# Altium PCB T35_V2.1.PcbDoc (part 5 of 5)
Units mil, origin at the board's own origin, x right, y up, seen from the top; angles counter-clockwise.
Board outline 2372.44 x 1023.62 mil, 12 copper layers (TOP, L2-G, L3, L4-G, L5, L6-V, L7-V, L8, L9-G, L10, L11-G, BOTTOM), stack 62.192 mil thick; 356 components, 288 nets, 1478 pads, 832 vias.
Unrouted connection lines stored in the file: 19.
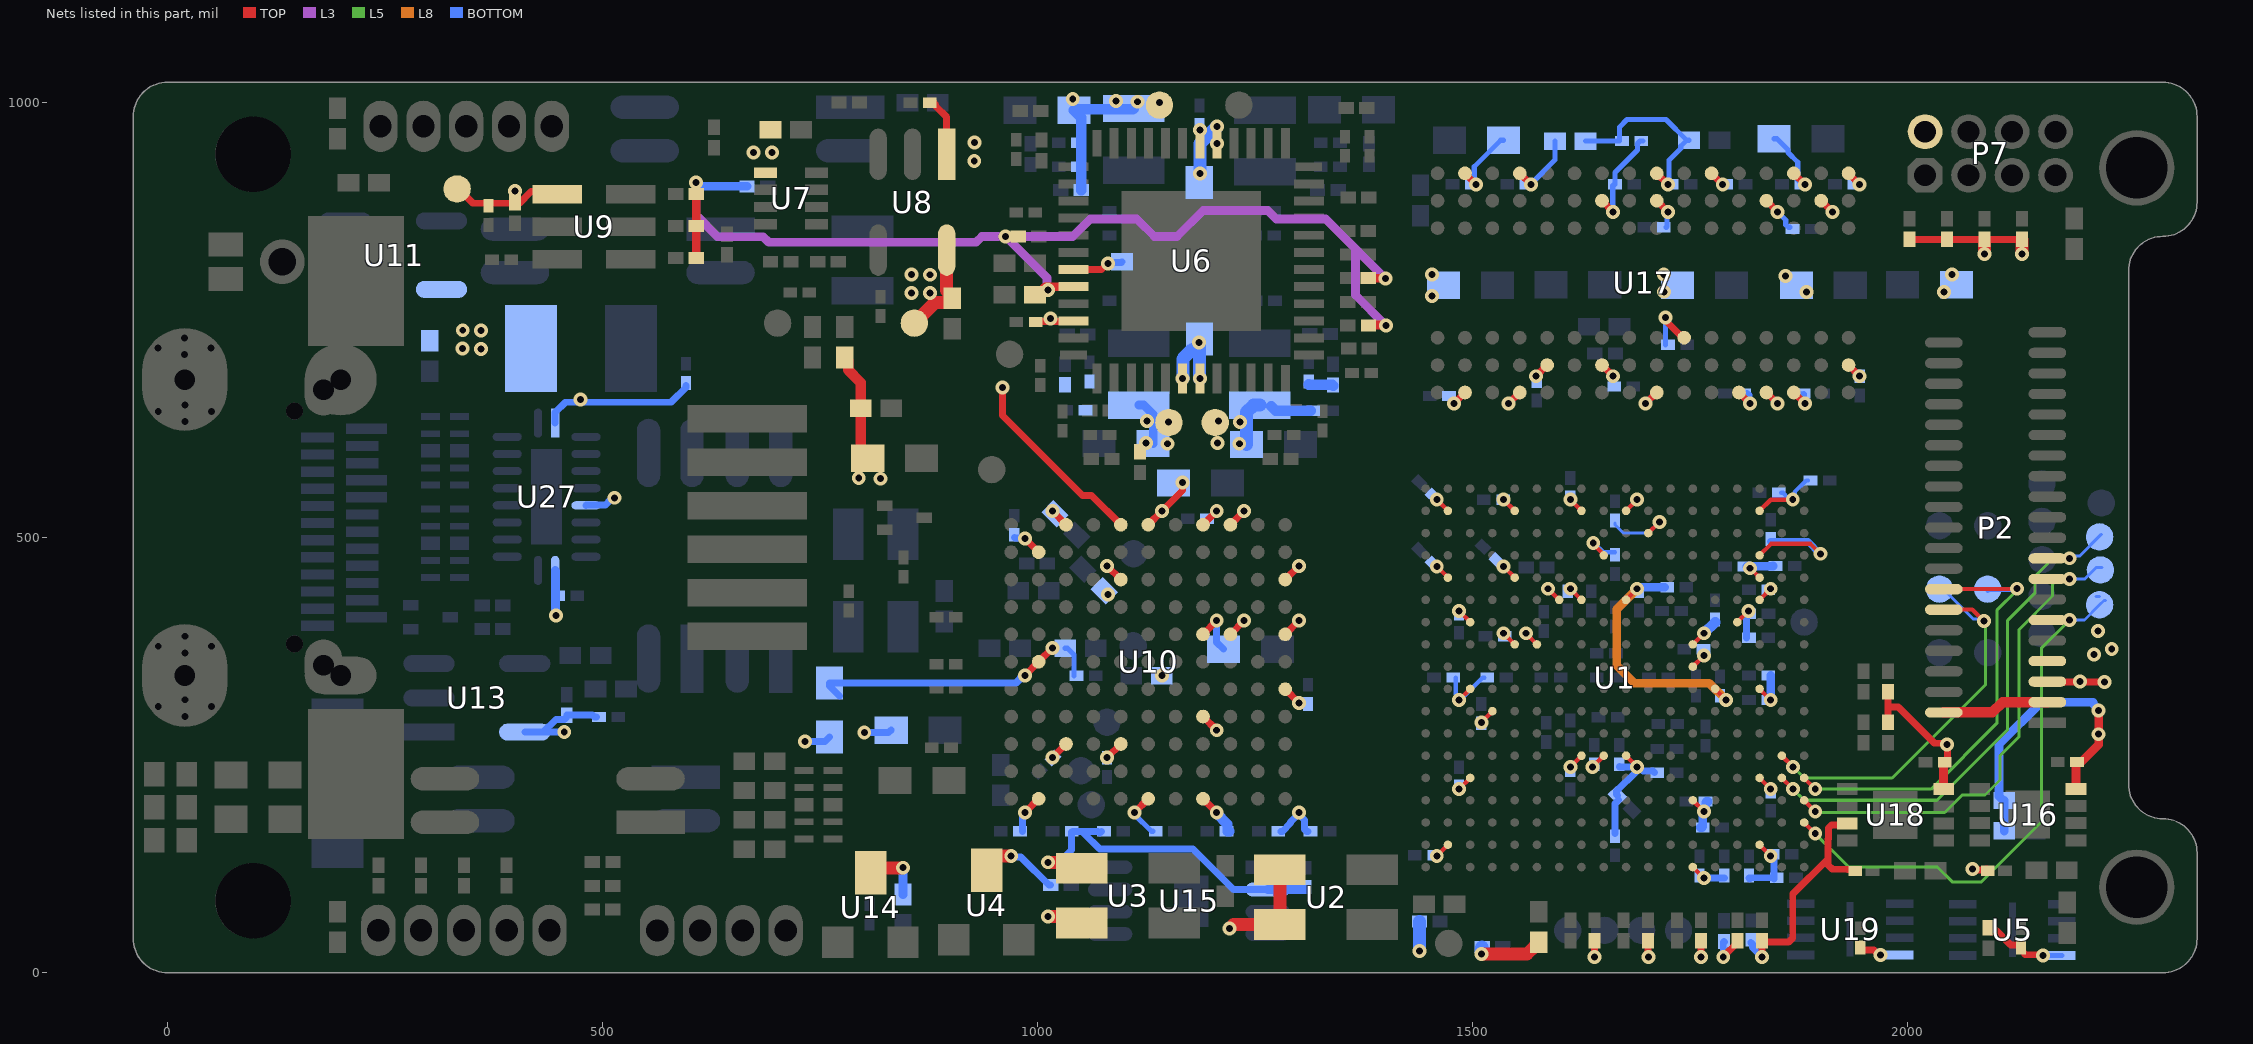
[diagram p15: the nets of this part, all layers, seen from the top]

## Via types
v1: diameter 16, hole 8, TOP to BOTTOM, tented both sides, 832 vias

## Nets (pads, with @x,y where several pads share a name; then routed paths per layer and width w, separated by ;. In a path a pad name is that pad's centre, name@x,y a point inside that pad or via, vN(x,y) a via of type N, cw(c..) or ccw(c..) an arc to the next point about the centre after c; other vN are vias at no path point) (continued)
VCC1V2_BR: C33.1 FB4.2 U1.N8 U1.P8 | length 36.2
  TOP w5: v1(1535.89,390.25) U1.P8@1548.69,377.46 ; v1(1561.48,390.25) U1.N8@1574.28,377.46
  other v1: 1453.84,777.82 1453.84,802.45
VCC1V2_MIPI_RX: C23.1 C24.1 C25.1 FB2.2 U1.C5 U1.H3 | length 130.4
  TOP w5: U1.H3@1702.23,505.41 v1(1715.02,518.21) ; v1(1819,465) 1819.2,465 1829.98,454.23 U1.C5@1830.18,454.23
  BOTTOM w3.5: C24.1@1664,516.97 1664,515 1673.55,505.46 1702.27,505.46 v1(1715.02,518.21)
  BOTTOM w10: C25.1@1815.39,467.02 1816.98,467.02 v1(1819,465) ; C25.1@1815.68,467.32 1845.29,467.32 C23.1@1845.58,467.61
  other v1: 1884.23,782.61 1860,800.98
VCC1V2_MIPI_TX: C20.1 C21.1 C22.1 FB1.2 U1.C2 U1.C6 | length 108.6
  TOP w5: U1.C6@1830.18,428.64 v1(1842.98,441.43) ; U1.C2@1830.18,531 1842.98,543.8 v1(1868.32,543.8)
  BOTTOM w5: C22.1@1855.05,551.83 1857.02,551.83 1862.94,545.9 1866.21,545.9 v1(1868.32,543.8) 1870.42,545.9 1870.42,552.53 1883.8,565.91 C21.1@1885.77,565.91
  other v1: 2042.15,782.61 2051.49,802.45
VCC1V2_TR: C34.1 C35.1 FB5.2 U1.F8 U1.F9 | length 54.3
  TOP w5: U1.F9@1753.41,351.87 v1(1766.21,364.66) ; U1.F8@1753.41,377.46 v1(1766.21,390.25)
  BOTTOM w12: v1(1766.21,390.25) C34.1@1779,403.05
  other v1: 1720.21,782.8 1720,802.45
VCC1V5: C36.1 C37.1 C38.1 C39.1 C40.1 C41.1 C42.1 C43.1 C85.2 C86.1 C89.1 C138.1 C139.1 C140.1 C141.1 C142.1 C143.1 C144.1 C145.1 C146.1 C147.1 C148.1 C149.1 C150.1 C151.1 C152.1 C153.1 C154.1 L2.2 R38.2 R79.2 T11.1 U1.J2 U1.K4 U1.L2 U1.L6 U1.P2 U1.P5 U1.T7 U1.U2 U1.U5 U17.A1 U17.A8 U17.B2 U17.C1 U17.C9 U17.D2 U17.D9 U17.E9 U17.F1 U17.G7 U17.H2 U17.H9 U17.K2 U17.K8 U17.N1 U17.N9 U17.R1 U17.R9 | length 1112.5
  TOP w5: v1(1459.12,467.02) U1.U5@1471.91,454.23 ; v1(1459.12,543.8) U1.U2@1471.91,531 ; v1(1484.71,415.84) U1.T7@1497.5,403.05 ; v1(1535.89,467.02) U1.P5@1548.69,454.23 ; v1(1535.89,543.8) U1.P2@1548.69,531 ; v1(1612.66,441.43) U1.L6@1625.46,428.64 ; v1(1612.66,543.8) U1.L2@1625.46,531 ; v1(1638.99,494) 1638.99,492.94 1651.05,480.88 U1.K4@1651.05,479.82 ; U1.J2@1676.64,531 v1(1689.43,543.8)
  TOP w8: v1(1478.73,654.23) U17.R9@1491.53,667.02 ; U17.R1@1491.53,918.99 v1(1504.32,906.2) ; v1(1541.72,654.23) U17.N9@1554.52,667.02 ; U17.N1@1554.52,918.99 v1(1567.32,906.2) ; U17.K8@1649.01,698.52 1661,686.53 v1@1661,686 ; U17.K2@1649.01,887.5 v1(1661.8,874.7) ; v1@1661.26,686.26 v1(1661.8,685.72) 1662,685.53 v1@1662,685 ; v1(1699.2,654.23) U17.H9@1712,667.02 ; U17.H2@1712,887.5 v1(1724.8,874.7) ; v1(1722.2,753) ccw(c1729.93,753) 1722.25,752.1 ccw(c1729.93,753) 1724.46,747.54 U17.G7@1744,728 ; U17.F1@1774.99,918.99 v1(1787.79,906.2) ; U17.E9@1806.49,667.02 v1(1819.28,654.23) ; U17.D9@1837.98,667.02 v1(1850.78,654.23) ; U17.D2@1837.98,887.5 v1(1850.78,874.7) ; U17.C9@1869.48,667.02 v1(1882.28,654.23) ; U17.C1@1869.48,918.99 v1(1882.28,906.2) ; U17.B2@1900.98,887.5 v1(1913.77,874.7) ; U17.A8@1932.47,698.52 v1(1945.27,685.72) ; U17.A1@1932.47,918.99 v1(1945.27,906.2)
  BOTTOM w5: v1(1638.99,494) 1639.78,494 1650.35,483.43 C38.1@1664,483.43
  BOTTOM w6: v1(1504.32,906.2) 1502.17,908.35 1502.17,926.6 1532.57,957 C146.1@1535.82,957 ; v1(1567.32,906.2) 1567.32,906.8 1595,934.48 R79.2@1595,956 ; v1(1661.8,874.7) 1661.4,875.1 1661.4,904.88 C142.1@1663.95,907.43 ; C142.1@1663.95,906.45 C142.1@1663.95,907.43 ; C154.1@1696,956 C154.1@1694.05,956 1692.68,956 1689.77,953.09 1689.77,945.77 1663.95,919.95 C142.1@1663.95,907.43 ; C152.1@1722,722 1722.1,722.1 1722.1,752.9 v1(1722.2,753) ; C140.1@1723,857 1723.9,857.9 1723.9,873.8 v1(1724.8,874.7) ; C147.1@1847,958.77 1850.25,958.77 1863,946.02 1863,942.77 1874,931.77 C138.1@1874,912 ; v1(1850.78,874.7) 1860.36,865.11 1860.36,859.91 1863.27,857 C148.1@1865,857 ; C138.1@1873.74,911.74 1879.28,906.2 v1(1882.28,906.2) ; C145.1@1876.95,666 1879.85,663.09 1879.85,659.36 1882.28,656.93 v1(1882.28,654.23) ; C145.1@1880.93,666 1881.6,665.33 1881.6,658.4 v1@1883,657
  BOTTOM w8: v1(1478.73,654.23) v1@1480.26,655.76 ; C144.1@1815.39,666 1815.85,666 1817.75,664.09 1817.75,655.76 v1(1819.28,654.23)
  BOTTOM w12: R38.2@1050.29,899.57 1050.29,983.11 C86.1@1041.97,991.43 1042.97,992.43 1109.64,992.43 L2.2@1110.64,993.43
  other v1: 1140.12,1000.18 1115.25,1001.24 1090.38,1002.3 1040.64,1004.42
VCC1V8: C3.2 C4.1 C50.1 C51.1 C52.1 C56.1 C57.1 C58.1 C59.1 C60.1 C94.2 C95.1 C97.1 C119.1 C120.2 L3.2 P2.2 P2.3 R42.2 R71.1 R72.1 R93.1 SJ2.1 T12.1 U1.C10 U1.C14 U1.E10 U1.F15 U1.J6 U3.1 U3.4 U15.2 U16.8 | length 1405.4
  TOP w5: U1.J6@1676.64,428.64 v1(1689.43,441.43) ; U1.F15@1753.41,198.32 v1(1766.21,185.53) ; U1.E10@1779,326.28 v1(1791.8,313.48) ; U1.C14@1830.18,223.91 v1(1842.98,211.12) ; U1.C10@1830.18,326.28 v1(1842.98,313.48)
  TOP w8: v1(2074.76,119.25) 2074.76,117.71 v1@2074.84,117.64 ; v1@2077.56,118.07 SJ2.1@2085.56,118.07
  TOP w10: v1(2074.76,119.25) 2076.39,119.25 v1@2077.56,118.07 ; SJ2.1@2091.38,118.07 SJ2.1@2092.28,117.16 ; U16.8@2193.93,211.35 2193.93,240.24 2195.96,242.27 2199.89,242.27 2220,262.37 v1@2220,295
  TOP w12: P2.2@2041.92,299.21 2097.81,299.21 2109.62,311.02 P2.3@2161,311.02
  TOP w15: v1(1012.43,64.88) U3.1@1044.07,64.88 ; v1(1012.43,127) 1044.07,127 U3.4@1050.85,120.22
  L8 w10: v1(1689.43,441.43) 1666,418 1666,353.17 1686.35,332.82 1772.46,332.82 v1(1791.8,313.48)
  BOTTOM w8: v1(1012.43,127) 1025,127 1039,141 C3.2@1039,161.22 ; C3.2@1039,162 C3.2@1039,161.22 ; 1053.14,160.69 1071.69,142.15 1178.85,142.15 1225.3,95.7 U15.2@1264.77,95.7 ; C4.1@1071.69,160.69 C4.1@1073.59,162.6 ; C4.1@1071.69,160.73 1069.82,162.6 1040.38,162.6 C3.2@1039,161.22
  BOTTOM w10: L3.2@1116.64,652.57 1122.29,652.57 1133.04,641.82 C95.1@1133.04,608.4 ; U15.2@1264.77,95.7 C119.1@1309.14,95.71 ; v1(1689.43,441.43) 1691,443 C56.1@1721,443 ; C51.1@1762,167 1763.97,167 1764.87,167.91 1764.87,182.57 1766.21,183.9 v1(1766.21,185.53) 1766.21,187.15 1768.13,189.07 1768.13,195.98 1769.03,196.89 C58.1@1771,196.89 ; v1(1842.98,313.48) C57.1@1842.98,341.74 ; R71.1@2111.29,163.07 R72.1@2111.29,198 2110.35,198 2105.35,203 2105.35,262.65 2153.79,311.1 2213.74,311.1 2213.74,308.88 2219.6,303.02 v1(2219.6,301.4)
  other v1: 2219.6,274.2 1149.58,608.13 1124.71,609.19 1150.64,633 1125.77,634.06
VCC2V5: C26.1 C27.1 C28.1 C106.1 T15.1 U1.C4 U1.D7 U8.5 | length 307.4
  TOP w5: U1.D7@1804.59,403.05 v1(1817.39,415.84) ; U1.C4@1830.18,479.82 1843.35,492.99 1888.69,492.99 v1(1900.06,481.61)
  TOP w15: T15.1@858.56,746.74 882.44,770.62 899.54,770.62 902.04,773.12 C106.1@902.04,775.34 902.04,777.84 895.78,784.1 U8.5@895.78,830.66
  BOTTOM w8: C26.1@1815,385 1815,413.46 v1(1817.39,415.84) ; C27.1@1842.98,495.61 1885.78,495.61 1899.78,481.61 v1(1900.06,481.61)
  other v1: 855.2,781.34 876.41,781.16 855.39,802.55 876.59,802.36
VCC3V3: C1.2 C2.1 C19.1 C31.1 C44.1 C45.1 C46.1 C47.1 C48.1 C49.1 C53.1 C54.1 C55.1 C61.1 C62.1 C63.1 C64.1 C65.1 C66.1 C99.2 C100.1 C101.1 C112.2 C115.2 C128.2 C129.2 C130.2 C131.2 C132.2 C157.1 C158.2 C159.2 FB9.1 L4.2 P2.5 P7.2 R3.1 R4.1 R5.2 R6.1 R7.1 R8.1 R9.2 R10.1 R11.1 R12.1 R13.1 R14.1 R15.1 R16.1 R17.1 R18.1 R45.2 R59.1 R60.1 R67.1 R68.1 R69.1 R70.2 R84.2 SJ1.1 T13.1 U1.C17 U1.F18 U1.J13 U1.K13 U1.L13 U1.R11 U1.T10 U1.T14 U1.U17 U2.1 U2.4 U4.3 U5.8 U10.B1 U10.C11 U10.E3 U10.F1 U10.H4 U10.H7 U10.H11 U10.J7 U10.L9 U13.5 U14.3 U18.3 U18.8 U19.8 U27.1 U27.6 U27.10 | length 2650.9
  TOP w5: v1(1459.12,134.35) U1.U17@1471.91,147.14 ; v1(1484.71,211.12) U1.T14@1497.5,223.91 ; v1(1484.71,313.48) U1.T10@1497.5,326.28 ; v1(1510.3,287.89) U1.R11@1523.09,300.69 ; v1(1612.66,236.71) U1.L13@1625.46,249.5 ; v1(1638.25,236.71) U1.K13@1651.05,249.5 ; U1.J13@1676.64,249.5 v1(1689.43,236.71) ; U1.F18@1753.41,121.55 v1(1766.21,108.76) ; U1.C17@1830.18,147.14 v1(1842.98,134.35) ; 1908,130 1908,128.36 1909,127.36 ; 1911.83,168.83 1914,168.83
  TOP w8: v1(985.68,184.26) U10.B1@1001.42,200.01 ; v1(1017.17,530.72) U10.C11@1032.92,514.97 ; v1(1080.16,247.25) U10.E3@1095.91,263 ; v1(1111.66,184.26) U10.F1@1127.41,200.01 ; U10.H4@1190.4,294.5 v1(1206.15,278.75) ; U10.H7@1190.4,388.99 v1(1206.15,404.73) ; U10.H11@1190.4,514.97 v1(1206.15,530.72) ; U10.J7@1221.9,388.99 v1(1237.64,404.73) ; U10.L9@1284.89,451.98 v1(1300.64,467.73) ; v1(1640.36,18) R12.1@1640.36,36.87 ; R14.1@1701.68,36.87 1701.98,36.57 1701.98,18.3 v1(1702.27,18) ; v1(1762.8,18) 1762.9,18.1 1762.9,36.77 R13.1@1762.99,36.87 ; v1(1788.4,18) 1788.4,18.56 1804.74,34.9 R84.2@1804.74,36.87 ; v1(1832.74,18) R9.2@1832.74,36.87 1834.49,35.11 1863.63,35.11 1868.32,39.79 1868.32,90.32 1908,130 ; 1913,170 1911.83,168.83 1909.16,166.16 1909.16,153.72 1909,153.56 1909,127.36 1909,124 1914,119 1931.38,119 1931.45,118.92 1938.03,118.92 SJ1.1@1939.94,117.02 ; 1914,170 1929.28,170 U18.3@1931,171.72 ; C31.1@1946,26.09 1961.53,26.09 1967.2,20.42 v1(1969.36,20.42) ; R11.1@1977.94,288 1977.94,305.42 ; R10.1@1977.94,322.83 1977.94,305.42 ; R15.1@2002.37,843.06 R17.1@2045.58,843.06 R18.1@2088.79,843.06 R16.1@2132,843.06 ; C158.2@2046,242 2046,261.88 v1(2045.58,262.3) 2044.05,263.83 2031.18,263.83 1989.59,305.42 1977.94,305.42 ; R7.1@2093.46,51.86 2093.46,49.9 2096.35,47.01 R7.1@2097,47.01 ; R7.1@2097,48 2103,48 2118.89,32.11 2126.51,32.11 2128.66,32.11 2130.56,30.21 C157.1@2130.56,29.04 ; C157.1@2130.07,28.55 2130.56,28.05 C157.1@2130.56,26.09 ; C157.1@2134.44,22.21 2135.93,20.72 2155.01,20.72 v1(2155.93,19.81) ; P2.5@2161.32,334.32 2226.28,334.32 v1(2226.6,334)
  TOP w10: U18.8@2041.63,211.09 C158.2@2041.63,236.41
  TOP w15: U14.3@808.57,115.04 813.74,120.22 845.03,120.22 v1(845.57,120.75) ; U4.3@941.71,117.8 941.71,123.85 952.21,134.35 v1(969.93,134.35) ; v1(1221,51) 1225.5,55.5 U2.1@1278.64,55.5 1278.64,116.64 U2.4@1283,121 ; v1(1510.3,21.53) 1562.82,21.53 1571.4,30.11 1573.9,30.11 1576.4,32.61 R4.1@1576.4,35.11 ; v1(2088.79,826.45) R18.1@2088.79,843.06 ; v1(2132,826.45) R16.1@2132,843.06
  BOTTOM w5: C46.1@1481,339.28 1481,320.16 1484.71,316.46 v1(1484.71,313.48) 1486.23,313.48 1512.03,339.28 C54.1@1514,339.28
  BOTTOM w6: v1(1111.66,184.26) 1111.66,182.01 1131.07,162.6 C129.2@1133.04,162.6 ; v1(2155.93,19.81) U5.8@2177.64,19.81
  BOTTOM w8: U13.5@410.74,276.61 U13.5@431.88,276.61 ; U27.1@445.69,631.78 445.69,643.78 457.69,655.79 v1@475,655.79 ; v1(456.11,276.61) U13.5@431.88,276.61 ; v1(475,659) v1@475,655.79 ; U27.6@481.12,537.29 481.4,537.56 503.36,537.56 v1@509.6,543.8 ; C115.2@493,294 491.03,294 488.84,296.19 R67.1@459,296.19 459,294.22 456.11,291.33 446.6,291.33 U13.5@431.88,276.61 ; v1@509.64,543.8 511.84,546 v1(514,546) ; C159.2@596.06,674.94 596.06,672.97 578.88,655.79 v1@475,655.79 ; v1(733,266) 756,266 FB9.1@761,271 ; v1(969.93,134.35) 971.46,132.82 981.41,132.82 1013.22,101 R70.2@1015.19,101 ; C128.2@983,162.6 983,179.42 985.68,182.1 v1(985.68,184.26) ; v1(1206.15,404.73) 1206.15,379.85 C132.2@1214,372 ; C2.1@1279.73,162.6 1281.69,162.6 1291.2,172.1 1291.2,173.48 v1@1300.64,182.92 ; v1(1300.64,184.26) v1@1300.64,182.92 ; C1.2@1311.07,162.6 1309.1,162.6 1307.2,164.51 1307.2,175.54 1300.64,182.1 v1@1300.64,182.92 ; C55.1@1664,160 1664,194.4 R8.1@1668.04,198.43 ; R8.1@1666.64,203.91 1665.87,204.68 1665.87,208.77 1687.9,230.8 1687.9,235.18 v1(1689.43,236.71) ; C62.1@1669,236.86 1669.08,236.78 v1(1689.43,236.71) v1(1689.43,236.71) ; C64.1@1709.61,230 1707.71,231.91 1696.4,231.91 1691.6,236.71 v1(1689.43,236.71) ; v1(1766.21,108.76) C53.1@1789.6,108.76 ; v1(1788.4,18) 1788.4,34.89 R5.2@1789.46,35.95 R5.2@1789.94,35.48 ; C66.1@1818,108.76 C66.1@1818.38,108.38 ; C66.1@1818.8,107.6 1818.8,108.09 1819.91,109.2 1846.98,109.2 1846.98,134.44 1845.42,136 C61.1@1845,136 ; C65.1@1820,35 1821.91,33.09 1821.91,28.83 v1(1832.74,18) ; C63.1@1846.6,108.38 C63.1@1846.98,108
  BOTTOM w10: U27.10@445.69,462.48 445.96,462.21 445.96,411.29 v1(446.6,410.66) ; R68.1@845.57,90 v1(845.57,120.75)
  BOTTOM w12: L4.2@1269,651 1273.91,646.09 1313.91,646.09 C99.2@1314,646 ; C101.1@1312,676.69 1312,676.26 1312.09,676.16 1338.84,676.16 R45.2@1340,675
  BOTTOM w15: C100.1@1240.29,607.27 1240.29,644.32 1248.54,652.57 L4.2@1255.64,652.57 ; v1(1439.19,25.25) R6.1@1439.19,58.7 ; v1(1510.3,21.53) 1510.49,21.72 1510.49,29.06 1511.1,29.67 R3.1@1511.21,29.67
  other v1: 2198.4,335 1143.16,341.74 1080.99,435 1232.08,608.13 1207.21,609.19 1233.14,633 1208.27,634.06
VCC3V3IOUSB: C126.2 C127.2 FB9.2 U10.B6 | length 385.1
  TOP w8: v1(985.68,341.74) U10.B6@1001.42,357.49 v1(1017.17,373.24)
  BOTTOM w6: v1(985.68,341.74) v1@987.24,341.74 ; C126.2@1032,373 1034.5,373 1042,365.5 C127.2@1042,341.28
  BOTTOM w8: FB9.2@772.75,318.01 761,329.76 FB9.2@761,333 974.77,333 983.51,341.74 v1(985.68,341.74) ; 936,333 976,333 v1@982,339
  BOTTOM w10: v1@981.65,339.35 983.31,341 v1@986,341
VCC5V: C29.1 C32.1 C68.2 C69.2 C70.2 C73.2 C104.1 C110.2 ECP1.1 P2.7 R52.1 T1.1 U6.5 U6.6 U6.22 U6.30 U6.31 U7.1 U8.1 U9.1 U10.E11 U11.5 | length 612.5
  TOP w8: T1.1@333,901 334.74,901 351.17,884.57 369.08,884.57 404.57,884.57 418,898 444.91,898 U9.1@447.95,894.97 ; R52.1@399.52,885.38 v1@399.5,898.49 ; C29.1@879.2,1000.18 881.17,1000.18 883.07,998.27 883.07,996.3 895.78,983.6 U8.1@895.78,940.9 ; v1(959.81,672.64) 959.81,640.74 1051.92,548.63 1062.25,548.63 U10.E11@1095.91,514.97 ; C73.2@1000.91,748.15 1001.5,748.74 1041.02,748.74 U6.22@1041.61,749.34
  BOTTOM w15: v1(1167.01,683) 1167.2,683.19 1167.2,705.75 C70.2@1178.1,716.65 ; v1(1185.86,724.41) 1186.52,723.75 1186.52,683.17 v1(1186.69,683) ; v1(1186.69,918.99) 1186.69,953.04 1206.38,972.73 v1(1206.38,973)
  other v1: 2214.4,366 2235,372 2219.2,392.8 339.25,717.39 360.46,717.21 339.43,738.6 360.64,738.42 1015.19,752.02 399.49,898.5 927.41,933.16 673.76,943.13 694.96,942.95 1206.38,953.47 927.59,954.36 1186.69,969
VCCFX3: C133.2 C134.2 C135.2 C136.2 C137.2 FB7.1 FB8.1 R76.1 R77.1 U10.B10 U10.C3 U10.E9 U10.F11 U10.H1 U10.J11 U10.L5 U10.L7 | length 421.3
  TOP w8: v1(985.68,499.22) U10.B10@1001.42,483.47 ; v1(1017.17,247.25) U10.C3@1032.92,263 ; v1(1080.16,467.73) U10.E9@1095.91,451.98 ; U10.F11@1127.41,514.97 v1(1143.16,530.72) 1167.01,554.57 v1(1167.01,563.5) ; U10.H1@1190.4,200.01 v1(1206.15,184.26) ; U10.J11@1221.9,514.97 v1(1237.64,530.72) ; U10.L5@1284.89,325.99 v1(1300.64,310.25) ; U10.L7@1284.89,388.99 v1(1300.64,404.73)
  TOP w12: R77.1@778.42,707.24 782.42,703.24 782.42,692.9 797,678.31 R76.1@797,649 797,599.38 FB7.1@805.02,591.36
  BOTTOM w8: v1(801,276) 829,276 FB8.1@832,279 ; C137.2@973.44,500.4 974.03,499.81 985.09,499.81 v1(985.68,499.22)
  BOTTOM w12: v1(1206.15,184.26) 1206.15,183.18 1218.51,170.82 1218.51,162.69 1218.6,162.6 C135.2@1220.38,162.6
  other v1: 819.53,567.91 794.66,568.97
VDD_DDR_VREF: C154.2 C155.1 C156.1 R79.1 R80.2 U1.M6 U17.H1 U17.M8 | length 262.7
  TOP w5: v1(1587.07,441.43) U1.M6@1599.87,428.64
  TOP w8: v1(1573.22,685.72) U17.M8@1586.02,698.52 ; U17.H1@1712,918.99 v1(1724.8,906.2)
  BOTTOM w6: R79.1@1630,956 1669,956 1669,972 1677.92,980.92 1722.58,980.92 R80.2@1746.5,957 ; v1(1724.8,906.2) 1726,907.4 1726,934 1739.5,947.5 1739.5,950 R80.2@1746.5,957 ; R80.2@1749,957 R80.2@1746.5,957
VDDA: C72.1 U6.19 | length 59.4
  TOP w8: U6.19@1041.61,808.39 1073.94,808.39 v1(1080.99,815.45)
  BOTTOM w8: v1(1080.99,815.45) 1081.93,816.38 1096.44,816.38 C72.1@1097.37,817.31
VDDD: C67.1 R25.1 R31.2 R43.1 R47.2 R48.2 R49.2 R53.2 U6.20 | length 1339.9
  TOP w8: v1(963.53,846.45) R43.1@978.1,846.45
  TOP w10: R49.2@607.76,821.57 R48.2@607.76,858.27 R47.2@607.76,894.97 v1(607.76,908.21) ; C67.1@997.12,779.45 999.62,779.45 1008.88,788.71 U6.20@1041.61,788.71 ; R31.2@1380.43,798.45 1399.55,798.45 v1(1400,798) ; R25.1@1381.04,744.6 v1@1400.17,744.6
  L3 w10: v1(607.76,908.21) 607.76,870.67 632.22,846.21 684.64,846.21 691.28,839.57 929.39,839.57 936.27,846.45 v1(963.53,846.45) ; v1(1012.26,785) 1011.11,786.15 1011.11,798.86 v1(963.53,846.45) ; v1(1400,798) 1365.72,832.28 ; v1(1400.61,744.15) 1365.72,779.04 1365.72,832.28 ; v1(963.53,846.45) 1040.82,846.45 1060.93,866.56 1114.35,866.56 1134.59,846.31 1160.51,846.31 1190.49,876.3 1264.97,876.3 1274.71,866.56 1331.44,866.56 1365.72,832.28
  BOTTOM w10: v1(607.76,908.21) 609.38,908.21 613.59,904 R53.2@666.19,904
XCLR: P2.14 T23.1 U1.A14 | length 543.1
  TOP w5: U1.A14@1881.36,223.91 v1(1894.16,211.12) ; P2.14@2041.92,440.94 2042.18,441.21 2125.74,441.21 v1(2126,441.47)
  L5 w3.5: v1(1894.16,211.12) 2027.35,211.12 2102.91,286.68 2102.91,416.6 2126,439.69 v1(2126,441.47)
  BOTTOM w5: T23.1@2092.4,439.3 2093.48,440.38 2127.38,440.38 v1@2128,441
XHS: P2.17 T34.1 U1.B14 | length 616.2
  TOP w5: U1.B14@1855.77,223.91 v1(1868.57,211.12) ; P2.17@2161,476.38 2186.66,476.38 v1(2186.66,476.45)
  L5 w3.5: v1(1868.57,211.12) 1881.36,198.32 2034.1,198.32 2115.38,279.6 2115.38,405.11 2147,436.73 2147,456 2167.45,476.45 v1(2186.66,476.45)
  BOTTOM w3.5: v1@2186.11,476.11 v1@2187,477 ; v1(2186.66,476.45) 2189.05,478.84 2197.84,478.84 T34.1@2223,504
XMASTER: P2.12 T27.1 U1.B13 | length 484.8
  TOP w5: U1.B13@1855.77,249.5 v1(1868.57,236.71) ; P2.12@2041.92,417.32 2042.18,417.58 2074.76,417.58 v1(2087.92,404.42)
  L5 w3.5: v1(1868.57,236.71) 1881.28,224 ; 1881.36,223.91 1982.65,223.91 2090.11,331.38 2090.11,402.23 v1(2087.92,404.42)
  BOTTOM w3.5: T27.1@2037,443 2039.22,443 2075.4,406.82 2085.53,406.82 v1(2087.92,404.42) ; v1@2084.96,404 v1@2088,404
XTRIG: P2.11 T29.1 U1.A16 | length 655.5
  TOP w5: U1.A16@1881.36,172.73 v1(1894.16,159.94) ; P2.11@2161,405.51 v1(2186.66,405.59) v1(2186.66,405.59)
  L5 w3.5: v1(1894.16,159.94) 1932.59,121.51 2034.49,121.51 2051.49,104.5 2085.35,104.5 2154.09,173.24 2154.09,373.01 v1(2186.66,405.59)
  BOTTOM w3.5: v1(2186.66,405.59) 2203.59,405.59 T29.1@2221,423 2226,428 T29.1@2228,428 ; T29.1@2217.12,432.66 T29.1@2221,432.66
XVS: P2.15 T36.1 U1.A15 | length 587.3
  TOP w5: U1.A15@1881.36,198.32 v1(1894.16,185.53) ; P2.15@2161,452.76 2186.66,452.76 v1(2186.66,452.83)
  L5 w3.5: v1(1894.16,185.53) 1895.42,184.26 2042.93,184.26 2063.06,204.39 2089.39,204.39 2106.5,221.5 2106.5,249.5 2128.5,271.5 2128.5,394.67 2166.88,433.05 2166.88,446.43 2173.28,452.83 v1(2186.66,452.83)
  BOTTOM w3.5: v1(2186.66,452.83) 2204.25,452.83 2217.42,466 T36.1@2224,466
pads on no net: CRY1.2 CRY1.4 P1. P1.A8 P1.B8 P4.1 P7.4 U1.A2 U1.A3 U1.A4 U1.A5 U1.A6 U1.A7 U1.A8 U1.A17 U1.B1 U1.B2 U1.B3 U1.B4 U1.B5 U1.B6 U1.B7 U1.B8 U1.B9 U1.B17 U1.B18 U1.C1 U1.C18 U1.D1 U1.D2 U1.D5 U1.D6 U1.D8 U1.D9 U1.D17 U1.D18 U1.E1 U1.E2 U1.E5 U1.E6 U1.E7 U1.E8 U1.E9 U1.E11 U1.E16 U1.E17 U1.E18 U1.F5 U1.F6 U1.F7 U1.F10 U1.F11 U1.F14 U1.F16 U1.G5 U1.G6 U1.G13 U1.G14 U1.G18 U1.H6 U1.H13 U1.H14 U1.H18 U1.K6 U1.K15 U1.K16 U1.L14 U1.L15 U1.L16 U1.L17 U1.L18 U1.M18 U1.R8 U1.T8 U1.V11 U1.V17 U7.6 U10.A11 U10.B11 U10.C4 U10.C10 U10.D1 U10.D2 U10.D3 U10.D6 U10.D7 U10.E7 U10.E8 U10.F2 U10.F6 U10.G4 U10.G5 U10.H6 U10.K5 U10.L4 U10.L8 U11.4 U17.J1 U17.J9 U17.L1 U17.L9

## Polygon pours and split planes (outlines as drawn)
GND on TOP "GND_L01_P016" (solid, remove dead copper, pour order 16): 0,0 -39.37,39.37 -39.37,988.13 -3.88,1023.62 2310.01,1023.62 2332.31,1001.32 2332.31,870.9 2301.08,839.66 2271.93,839.66 2271.93,214.17 2333.07,153.03 2333.07,32.45 2300.63,0
VCC5V on TOP "VCC5V_L01_P038" (solid, remove dead copper, pour order 38): 886,912 886,970 871,985 871,1008 875,1012 888,1012 889,1011 889,998 910,977 936,977 950,963 950,916 944,910 888,910
VCC5V on TOP "VCC5V_L01_P036" (solid, remove dead copper, pour order 36): 675.6,914 661.41,928.19 660.5,928.19 660.5,986.33 670.47,996.3 705.13,996.3 709,992.43 709,918 705,914
NetL5_1 on TOP "NETL5_1_L01_P035" (solid, remove dead copper, pour order 35): 17 vertices, not listed, extent 751,865 832,922
VCC1V0 on TOP "VCC1V0_L01_P031" (solid, remove dead copper, pour order 31): 695,728 682,741 682,755 693,766 725,766 733,774 733,792 742,801 801,801 805,797 805,737.56 795.44,728
VCC2V5 on TOP "VCC2V5_L01_P030" (solid, remove dead copper, pour order 30): 842,738 842,826 878,862 906,862 922,846 922,772 913,763 886,763 879,756 879,738 872,731 849,731
VCC1V8 on TOP "VCC1V8_L01_P029" (solid, pour order 29): 2176.2,316.8 2181.4,316.8 2224.6,316.8 2240.8,300.6 2240.8,259.2 2234.8,253.2 2209.4,253.4 2202.4,260.4 2202.4,296.6 2196,303 2182,303 2176.2,308.8
VCC1V2 on TOP "VCC1V2_L01_P027" (solid, remove dead copper, pour order 27): 819.53,659 820.73,660.2 820.73,677.81 832.71,689.79 859.78,689.79 873.75,703.76 926.78,703.76 941.71,688.84 941.71,640.66 928.03,626.99 827.46,626.99 819.53,634.91 819.71,635.09 819.71,659
VCC3V3 on TOP "VCC3V3_L01_P013" (solid, pour order 13): 2178.4,340.2 2180.8,342.6 2238.2,342.6 2242.4,338.4 2242.4,327.6 2238.6,323.8 2184.4,323.8 2178.6,329.6 2178.6,340.2
VCC5V on TOP "VCC5V_L01_P010" (solid, pour order 10): 2193.8,352.8 2142.4,352.8 2139.4,355.8 2139.4,360.4 2143.2,364.2 2193.6,364.2 2204.8,375.4 2204.8,391 2215.8,402 2233.4,402 2245.2,390.2 2245.2,352.8
GND on L3 "GND_L03_P019" (solid, remove dead copper, pour order 19): -44,1050 2336,1050 2357,1029 2357,-51 -11,-51 -84,22 -82,24 -82,1018 -76,1018
VCC5V on L3 "VCC5V_L03_P002" (solid, pour order 2): 39 vertices, not listed, extent 327,353 2245.8,992.51
VCC5V on L3 "VCC5V_L03_P039" (solid, remove dead copper, pour order 39): 481.34,936.08 514.27,969 1153.89,969 1177.32,992.43 1190.49,992.43 1190.49,992.12 1206.38,976.23 1206.38,926.1 491.32,926.1
VCC2V5 on L3 "VCC2V5_L03_P000" (solid, pour order 0): 25 vertices, not listed, extent 834.6,327 1921.2,820.06
GND on BOTTOM "GND_L12_P018" (solid, remove dead copper, pour order 18): 0,0 -39.37,39.37 -39.37,988.13 -3.88,1023.62 2310.01,1023.62 2332.31,1001.32 2332.31,870.9 2301.08,839.66 2271.93,839.66 2271.93,214.17 2333.07,153.03 2333.07,32.45 2300.63,0
NetL5_1 on BOTTOM "NETL5_1_L12_P033" (solid, remove dead copper, pour order 33): 765,869 765,876 752,889 752,911 763,922 808,922 834,896 834,870
VCC1V0 on BOTTOM "VCC1V0_L12_P032" (solid, remove dead copper, pour order 32): 804,769 804,736 796,728 721,728 714,735 714,762 756,804 833,804 838,799 838,771 836,769
VCC5V on BOTTOM "VCC5V_L12_P007" (solid, pour order 7): 348.6,665.4 334.4,679.6 334.4,698 316.6,715.8 287.2,715.8 276,727 276,790.8 286,800.8 335.2,800.8 361.6,774.4 449.8,774.4 463.2,761 463.2,672.2 456.4,665.4
VCC3V3 on BOTTOM "VCC3V3_L12_P009" (solid, pour order 9): 1194.82,589.13 1185.07,598.88 1185.07,657.32 1202.75,675 1289.8,675 1298.72,683.92 1353.63,683.92 1353.63,664.31 1349.41,660.09 1328.72,660.09 1328.72,646.52 1313.98,631.78 1266.92,631.78 1266.92,596.34 1259.71,589.13
VCC1V8 on BOTTOM "VCC1V8_L12_P008" (solid, pour order 8): 18 vertices, not listed, extent 1019.06,589.13 1170,685.72
GND on L8 "GND_L08_P021" (solid, remove dead copper, pour order 21): -49,1031 -47,1033 2335,1033 2408,960 2408,9 2357,-42 -23,-42 -81,16 -81,998 -49,1030
VCC1V2 on L8 "VCC1V2_L08_P028" (solid, remove dead copper, pour order 28): 872.5,692.85 879.13,699.49 919.14,699.49 928,690.63 929,663
VCC1V2 on L8 "VCC1V2_L08_P025" (solid, remove dead copper, pour order 25): 22 vertices, not listed, extent 839.82,583.03 1353.8,1018
VCC5V on L8 "VCC5V_L08_P003" (solid, pour order 3): 950.93,660.34 941.71,669.56 941.71,703.7 1007.42,769.41 1120.99,769.41 1167.01,815.42 1167.01,973.69 1180.21,986.89 1214.79,986.89 1233.14,968.54 1233.14,698.68 1194.79,660.34
GND on L5 "GND_L05_P020" (solid, remove dead copper, pour order 20): -42.82,1028.99 2338,1029 2348,1019 2348,0 -31,0 -42.82,11.82
GND on L10 "GND_L10_P022" (solid, remove dead copper, pour order 22): -54,1033 2335,1033 2398,970 2398,32 2338,-28 -2,-28 -95,65 -95,992
GND on L2-G (split plane): 99 vertices, not listed, extent -19.32,20.05 2313.02,1003.57
GND on L4-G (split plane): 99 vertices, not listed, extent -19.32,20.05 2313.02,1003.57
VCC3V3 on L6-V (split plane): 154 vertices, not listed, extent -19.32,20.05 2313.02,1003.57
VCC1V2 on L6-V (split plane): 79 vertices, not listed, extent 1207.56,254.82 2053.44,1003.53
VCC1V5 on L6-V (split plane): 82 vertices, not listed, extent 974.17,397.82 1971.44,1003.53
VCCFX3 on L7-V (split plane): 21 vertices, not listed, extent 779.56,173.56 1324.29,611.46
VCC1V8 on L7-V (split plane): 130 vertices, not listed, extent -19.32,20.05 2313.02,1003.57
VCC1V2_BR on L7-V (split plane): 31 vertices, not listed, extent 1224.49,264.93 1597.15,1003.53
VDD_DDR_VREF on L7-V (split plane): 44 vertices, not listed, extent 1494.16,406.91 1756.54,1003.53
VCC1V2_BL on L7-V (split plane): 77 vertices, not listed, extent 1583.78,232.56 1796.44,867.14
VCC1V2_TR on L7-V (split plane): 62 vertices, not listed, extent 1665.12,328.87 1798.92,867.14
VCC1V2_MIPI_RX on L7-V (split plane): 57 vertices, not listed, extent 1700.86,438.13 1943.84,1003.53
VCC1V2_MIPI_TX on L7-V (split plane): 64 vertices, not listed, extent 1814.05,342.28 2313.02,1003.57
GND on L9-G (split plane): 99 vertices, not listed, extent -19.32,20.05 2313.02,1003.57
GND on L11-G (split plane): 99 vertices, not listed, extent -19.32,20.05 2313.02,1003.57

## Keep-outs
Keep-Out Layer:
  lines w10: -39.37,39.37 ccw(c0,39.37) 0,0 2214.96,0 2293.7,0 ccw(c2293.7,39.37) 2333.07,39.37 2333.07,137.8 ccw(c2293.7,137.8) 2293.7,177.17 cw(c2293.7,216.54) 2254.33,216.54 2254.33,807.09 cw(c2293.7,807.09) 2293.7,846.46 ccw(c2293.7,885.83) 2333.07,885.83 2333.07,984.25 ccw(c2293.7,984.25) 2293.7,1023.62 2214.96,1023.62 0,1023.62 ccw(c0,984.25) -39.37,984.25 -39.37,39.37

## Other copper
TOP:
  pour cut-out: 2007.03,308.17 2007.03,740.86 2019.09,752.93 2174.51,752.93 2174.51,284.14 2031.06,284.14
  pour cut-out: 1910,228 1910,228.02 1916.41,234.43 2208.21,234.43 2224.1,218.54 2224.1,144.56 2221.51,144.56 2209.87,132.91 1916.55,132.91 1909,140.46 1909.98,141.44 1909.98,228.24
  pour cut-out: 1418,565 1424.88,582.68 1906.9,582.68 1914.53,575.05 1914.53,97.99 1906.85,90.32 1422.93,90.32 1416.61,96.63 1418,98.02
  pour cut-out: 932,554 1316.75,554 1324.29,546.46 1321.33,543.5 1321.33,159.94 952.11,159.94 929.88,182.16 929.88,552.95 931.75,554.81
  region net VCC1V8: 1110,591 1110,590.79 1111.66,589.13 1159.42,589.13 1168.96,598.67 1168.96,655.3 1167.01,657.25 1121.26,657.25 1110.17,646.15 1110.17,591.25
  region net VCC3V3: 1244.33,591 1244.33,590.79 1242.67,589.13 1194.91,589.13 1185.37,598.67 1185.37,655.3 1187.32,657.25 1233.06,657.25 1244.16,646.15 1244.16,591.25
L3:
  pour cut-out: 1384.13,422.03 1384.13,570.29 1338.2,616.22 1338.2,838.28 1412.91,912.99 1597.89,912.99 1663.84,847.04 1663.84,666.5 1707.48,622.86 1707.48,392.74 1690.4,375.66 1430.5,375.66
L5:
  pour cut-out: 1491.53,224.36 1468.36,224.36 1722.2,224.36 1722.2,121.75 1683.2,82.75 1680.94,85.01 1492.32,85.01 1492.32,199.68
  pour cut-out: 1684,83 2114.16,83 2208.57,177.41 2208.57,563 2183.07,588.5 1879.62,588.5 1683.2,392.08 1683.2,82.75
  pour cut-out: 1381.78,64.49 1305.16,141.11 1146.2,141.11 1076.61,210.7 1076.61,457.05 1153.56,534 1340.34,534 1390.44,584.1 1390.44,792.04 1524.9,926.5 1928.29,926.5 1964.82,889.97 1964.82,587.45 1441.86,64.49
L8:
  pour cut-out: 1322,182 1283.59,143.59 1133.01,143.59 1029.17,247.43 1029.17,351.87 1062.54,385.24 1096.48,385.24 1131.16,419.92 1131.16,470.11 1135.93,470.11 1196.31,530.49 1351.04,530.49 1381.78,561.23 1381.78,839.35 1464.01,921.57 1894.53,921.57 1894.53,920.08 1990.64,823.97 1990.64,610.48 1819.98,439.81 1649.03,439.81 1628.93,419.71 1628.93,234.94 1575.86,181.87 1575.21,182.53 1321.68,182.53
L10:
  pour cut-out: 1510.3,134.35 1508.7,132.75 1170.15,132.75 1113,189.9 1113,500.69 1374.59,762.27 1473.47,762.27 1627.25,608.49 1627.25,148.24 1613.36,134.35
  pour cut-out: 1582,860 1582.26,859.74 1859.01,859.74 1920.15,798.6 2107.57,798.6 2152.62,753.55 2152.62,427.81 2079.21,354.39 1989.01,354.39 1946.82,396.58 1839.74,396.58 1749.94,486.38 1749.03,485.47 1700.76,485.47 1656.72,441.43 1561.88,441.43 1404.36,598.95 1404.36,682.02 1582.08,859.74
L2-G (plane layer: these items are gaps in the copper):
  rectangle: 869.13,316 923.6,364.66
  region: 174,739.62 174,767.62 160,767.62 160,739.62
  lines w15: 417,966.8 417,977.8 ; 1664.66,213.62 1664.66,213.62
L4-G (plane layer: these items are gaps in the copper):
  region: 174,739.62 174,767.62 160,767.62 160,739.62
  lines w15: 417.6,968.2 417.6,978
L9-G (plane layer: these items are gaps in the copper):
  region: 174,739.62 174,767.62 160,767.62 160,739.62
  lines w15: 417.2,967.8 417.2,977.6
L11-G (plane layer: these items are gaps in the copper):
  region: 174,739.62 174,767.62 160,767.62 160,739.62
  lines w15: 417,968.2 417,978.8
L6-V (plane layer: these items are gaps in the copper):
  lines w15: 987.18,1023.62 943.38,1023.62 987.18,979.82 1069.85,897.14 1399,568 1399,417.78 1426.53,390.25 1554.52,390.25 ; 1011,1007.62 1020,1007.62 ; 1200,1005.18 1200,971.82 1245.32,926.5 1945.1,926.5 1964,907.61 1964,855.3 1954.92,846.21 ; 1541.72,831.45 1540.68,831.45 ; 1925.49,1023.62 2061,888.11 2061,546.06 1980,465.06 1768.07,253.13 1762.2,253.13 1756.32,247.25 1591.89,247.25 1554.52,284.63 1554.52,416.41 1567.32,429.21 1732.67,429.21 1933.16,629.7 1979,675.54 1979,733.7 1948.7,764 ; 1979.35,733.35 1948.7,764 ; 1540.68,831.45 1515.8,806.56 1515.8,780.02 1515.87,780.02 1531.89,764 1948.7,764 ; 1540.68,831.45 1940.16,831.45 1954.92,846.21 ; 1954.92,846.21 1954.92,846.21
L7-V (plane layer: these items are gaps in the copper):
  lines w15: 772,316 772,570.87 ; 772,330.74 772,264.83 870.83,166 1182,166 1232.08,166 ; 772,557.07 772,600.25 790.78,619.03 872.77,619.03 904.99,586.81 1130.05,586.81 1216.28,586.81 1238.38,564.72 1331.85,471.24 1331.85,257.36 ; 1200,166 1240.49,166 1331.85,257.36 ; 1217.32,591.59 1217.32,1027.62 ; 1403,1030.6 1403.4,1031 ; 1486.6,1017 1486.6,452.27 1528.2,410.67 1566.65,410.67 1604.72,372.61 1604.72,257.36 ; 1536.71,8.9 1613.48,8.9 ; 1586.02,401.11 1604.72,419.81 1604.72,467.73 1576.21,496.23 1576.21,548.83 1604.72,577.33 ; 1600.45,573.06 1604.72,577.33 ; 1604.72,600.25 1604.72,577.33 ; 1693.3,874.7 1693.3,771.15 1693.3,767.79 1657.55,732.04 1657.55,410.67 1725.37,342.85 ; 1722.2,346.02 1745.06,323.16 1766.21,323.16 ; 1722.2,582.68 1722.2,559.9 ; 1722.2,685.72 1722.2,559.9 ; 1724.8,685.72 1785,745.93 1785,825.12 1737.69,872.43 1737.69,874.7 ; 1729.64,0 1843.8,0 ; 1764.1,1023.62 1764.1,901.11 1737.69,874.7 ; 1787.52,334.72 1788.54,334.72 ; 1805.05,428.15 1761.96,471.24 1722.2,471.24 1693.3,500.14 1693.3,531 1722.2,559.9 ; 1806.49,334.72 1806.49,428.15 1872.63,494.29 ; 1873.08,494.74 1872.18,494.74 1837.98,528.94 1837.98,569.92 1907.67,639.6 1951.4,639.6 1951.4,1017 ; 2254.15,334.72 1788.54,334.72 ; 1331.85,257.36 1710.09,257.36 1710.09,255.53 1740.61,225 1775.96,225 1804,253.04 1804,264.4 1775.96,292.44 1775.96,323.16 1776.99,323.16 1788.54,334.72 ; 1604.72,577.33 1604.72,854.46 1624.95,874.7 1737.69,874.7

## Silkscreen, mask and mechanical layers (free items; w line width, h text height)
Top Overlay:
  circle w10: c2214.4,989.86 r7.18
  circle w10: c724.6,251.6 r1.34
  lines w3: -8.8,108.2 0,99.4 ; -6.6,71.84 5.56,71.84 ; -6.4,54.84 5.76,54.84 ; -6.4,88.64 5.76,88.64 ; -0.44,65.8 -0.44,77.96 ; -0.24,48.8 -0.24,60.96 ; -0.24,82.6 -0.24,94.76 ; 0,119.86 0,99.4 ; 0.2,120 15.1,134.9 ; 8.8,108.2 0,99.4
  lines w3.94: 1338.61,953.47 ccw(c1331.62,951.72) 1338.83,951.72
  text "1.5V" at 1056,988.3 h40
  text "1.2V" at 1253,988.13 h40
  text "5.0V" at 290,853.3 h40
  text "39" at 2183,750.3 h40
  text "38" at 1990.37,736.45 h40
  text "1.0V" at 661.43,702.9 h40
  text "2.5V" at 821.92,702.9 h40
  text "1.8V" at 1132,585.3 h40
  text "3.3V" at 1190,585.3 h40
  text "T35-V2.1" at 1974.48,376 h70 r90
  text "2" at 1999,289 h40
  text "1" at 2198,277 h40
  text "1M" at 1948,229.08 h30
  text "64K" at 2089.06,228.83 h30
  text "WP" at 1934,87.11 h30
  text "WP" at 2089.06,87.11 h30
  text "50M" at 1496.35,68.38 h40
  text "NSTATUS" at 1496.33,43 h20
Bottom Overlay:
  lines w6: 333,712.6 364,712.6 ; 349.2,697.6 349.2,728.6
  lines w10: 1858.23,7.32 ccw(c1856,6.4) 1858.4,6.58 ; 2045.83,6.32 ccw(c2043.6,5.4) 2046,5.58
  text "GND-GND-TGND-        TOUT-TIN" at 936,893.74 h40
  text "AMPV" at 2161.07,706.11 h40
  text "SDA" at 2226.77,696.3 h40
  text "CTL4" at 2161,679.65 h40
  text "XHS" at 2227.75,669.29 h40
  text "CTL5" at 2161,653.18 h40
  text "XVS" at 2225.94,642.28 h40
  text "INCK" at 2161.04,626.74 h40
  text "XTRIG" at 2255.07,615.3 h40
  text "CTL2" at 2161,600.26 h40
  text "RX" at 1167.05,364.77 h40
  text "TEC_EN" at 2175,317.85 h40
  text "SCL" at 2053,317.3 h40
  text "RTS" at 1148.33,277.14 h40
  text "XCLR" at 2140.98,277.1 h40
  text "XMAS" at 2053.07,276.74 h40
  text "CTL1" at 2053,236.26 h40
  text "CTL3" at 2135.76,236.3 h40
  text "TX" at 1128,221.11 h40
  text "CTS" at 1135,182.3 h40
  text "GND-GPIO4-3-2-1" at 486.25,130.04 h40
  text "TX-GND-RX-RESET" at 772,130.04 h40
  text "GPIO5-8" at 1727.72,78.74 h40
Mechanical 1:
  lines w10: -39.37,39.37 ccw(c0,39.37) 0,0 2214.96,0 2293.7,0 ccw(c2293.7,39.37) 2333.07,39.37 2333.07,137.8 ccw(c2293.7,137.8) 2293.7,177.17 cw(c2293.7,216.54) 2254.33,216.54 2254.33,807.09 cw(c2293.7,807.09) 2293.7,846.46 ccw(c2293.7,885.83) 2333.07,885.83 2333.07,984.25 ccw(c2293.7,984.25) 2293.7,1023.62 2214.96,1023.62 0,1023.62 ccw(c0,984.25) -39.37,984.25 -39.37,39.37